# Altium PCB PCB3.PcbDoc
Units mm, origin at the board's own origin, x right, y up, seen from the top; angles counter-clockwise.
Board outline 43.69 x 43.69 mm, 2 copper layers (Top Layer, Bottom Layer); 46 components, 41 nets, 119 pads, 43 vias.
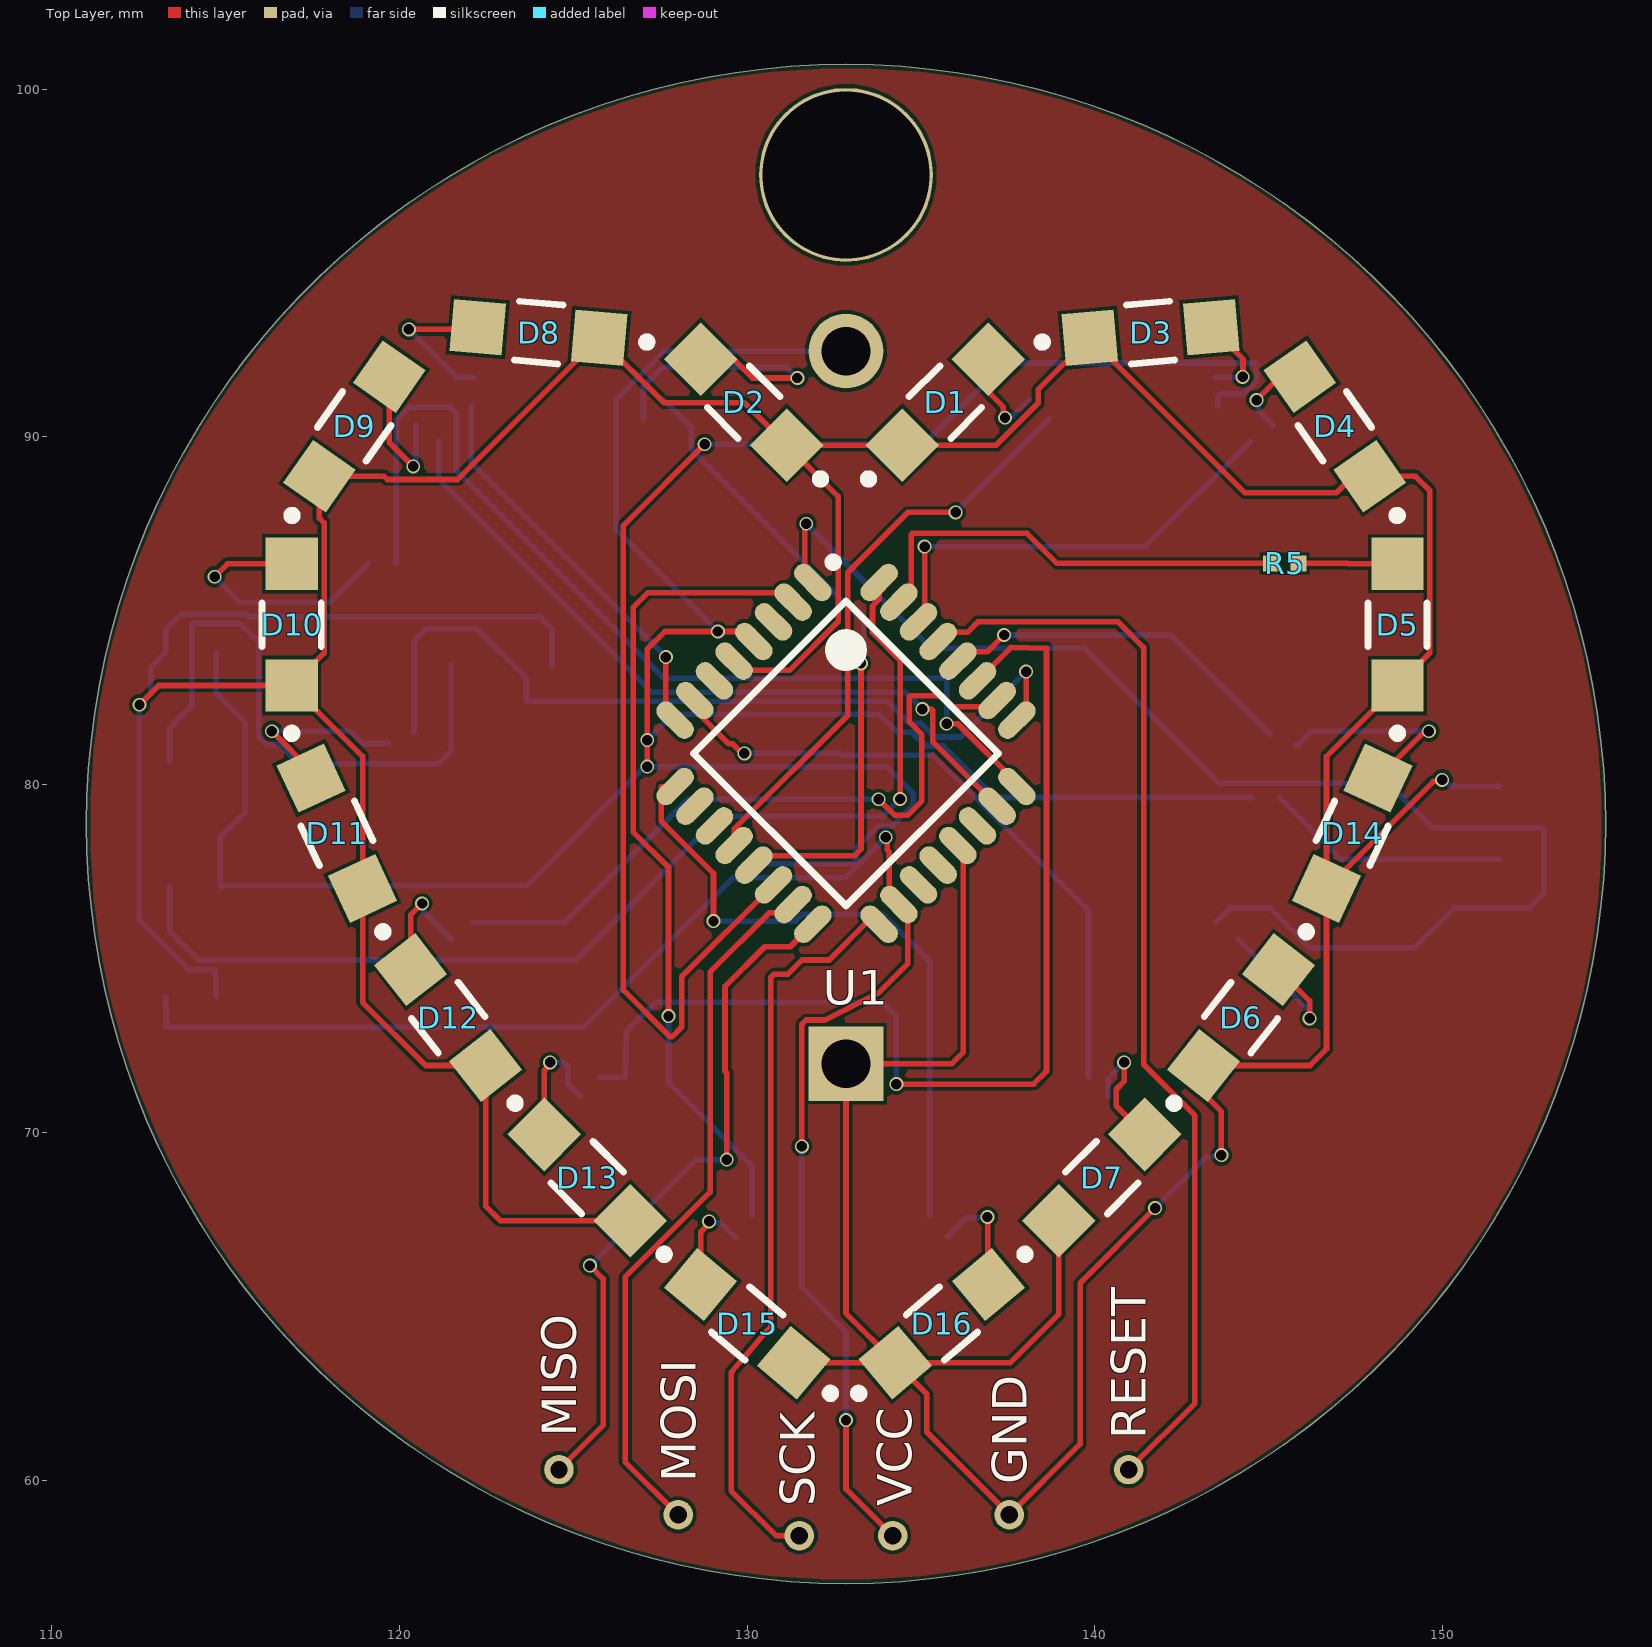
[diagram p0: Top Layer view]
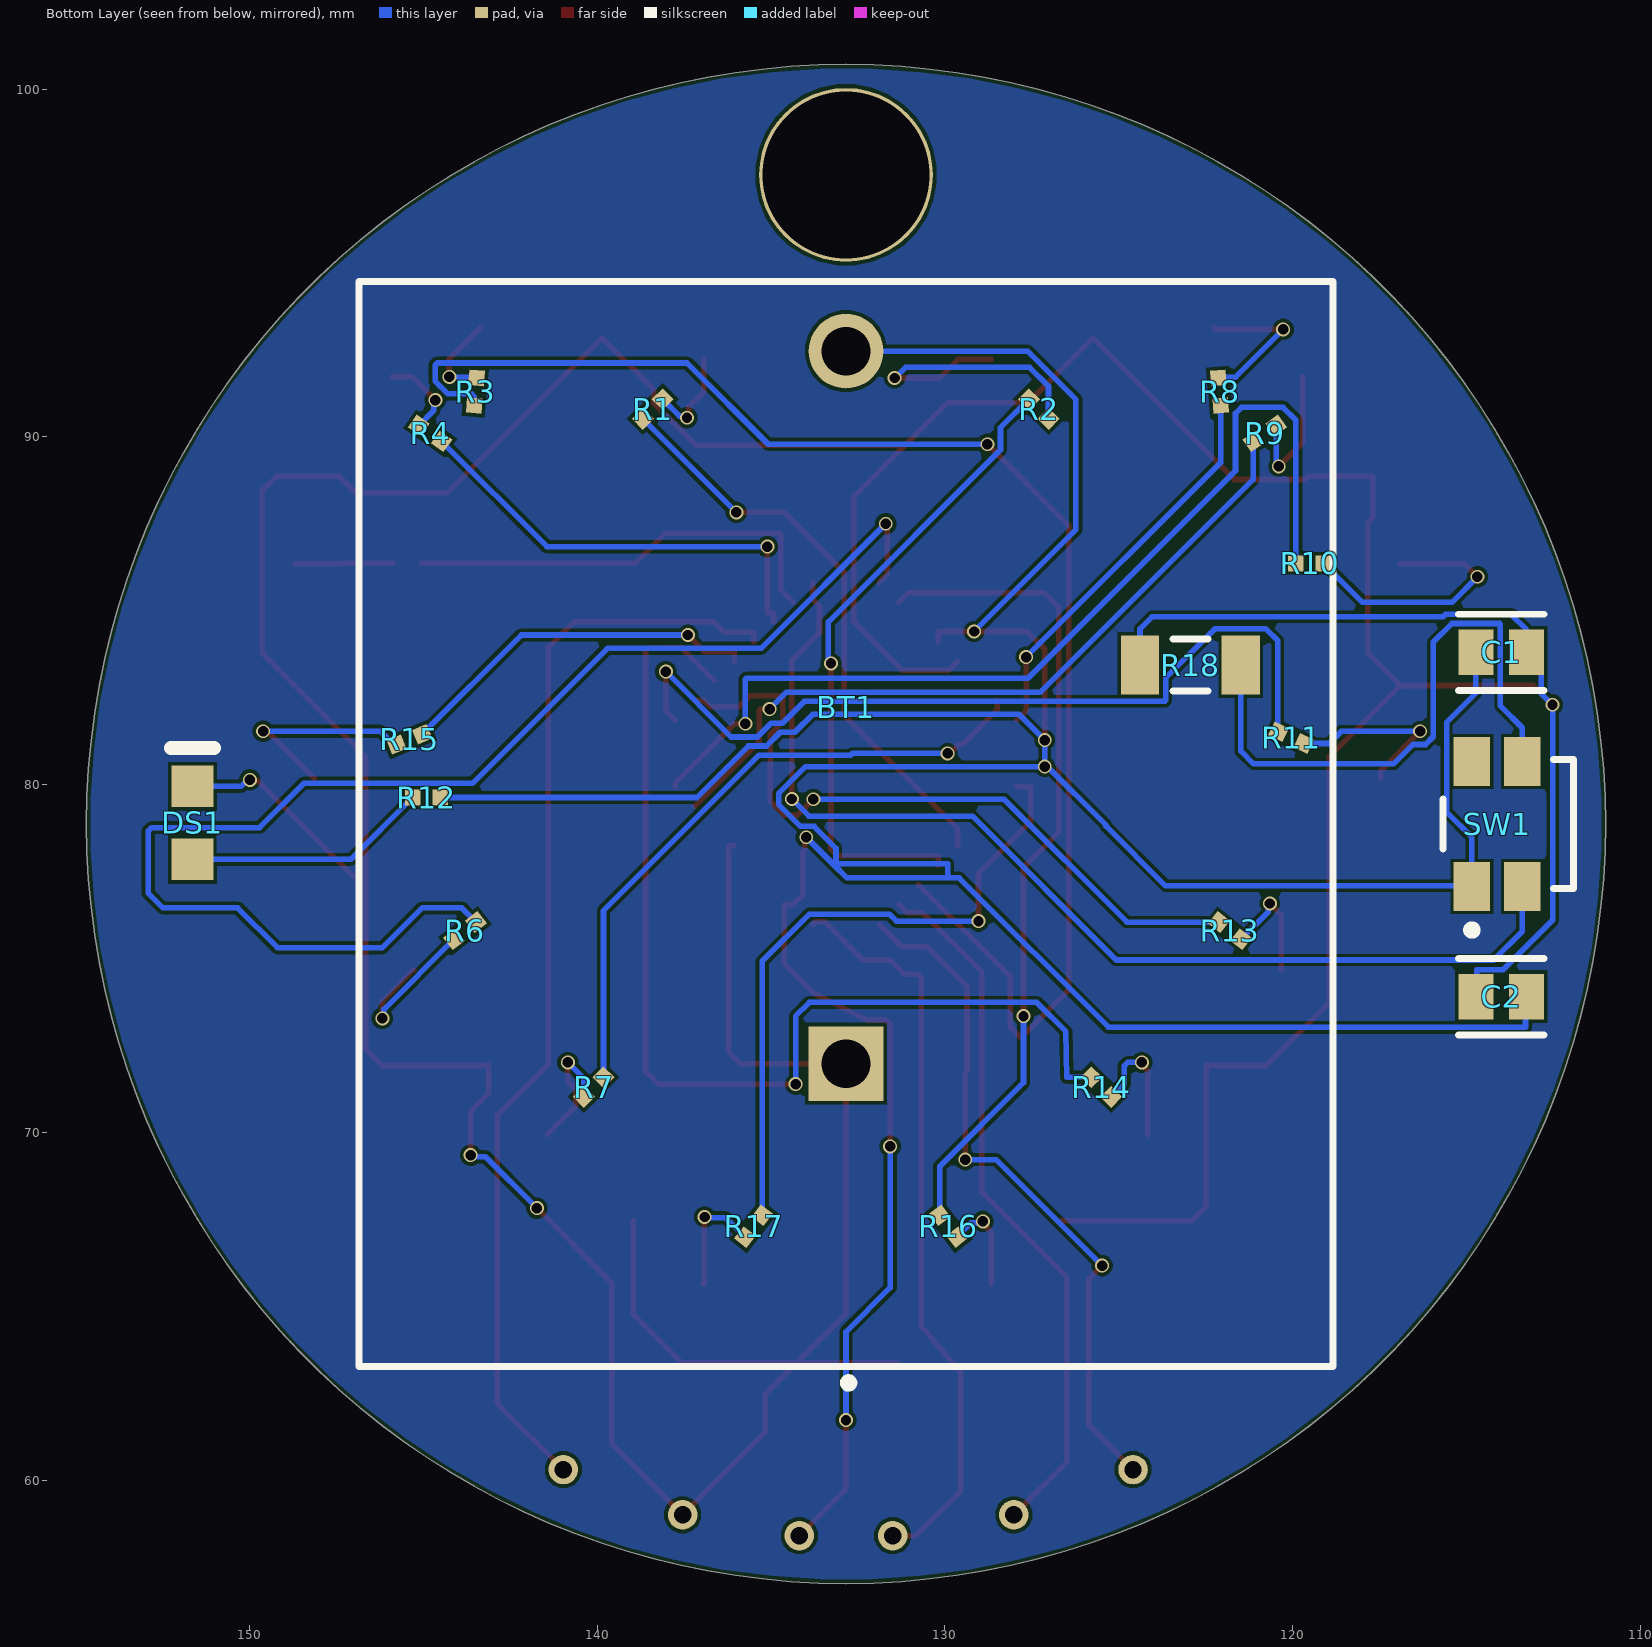
[diagram p1: Bottom Layer view, seen from below]
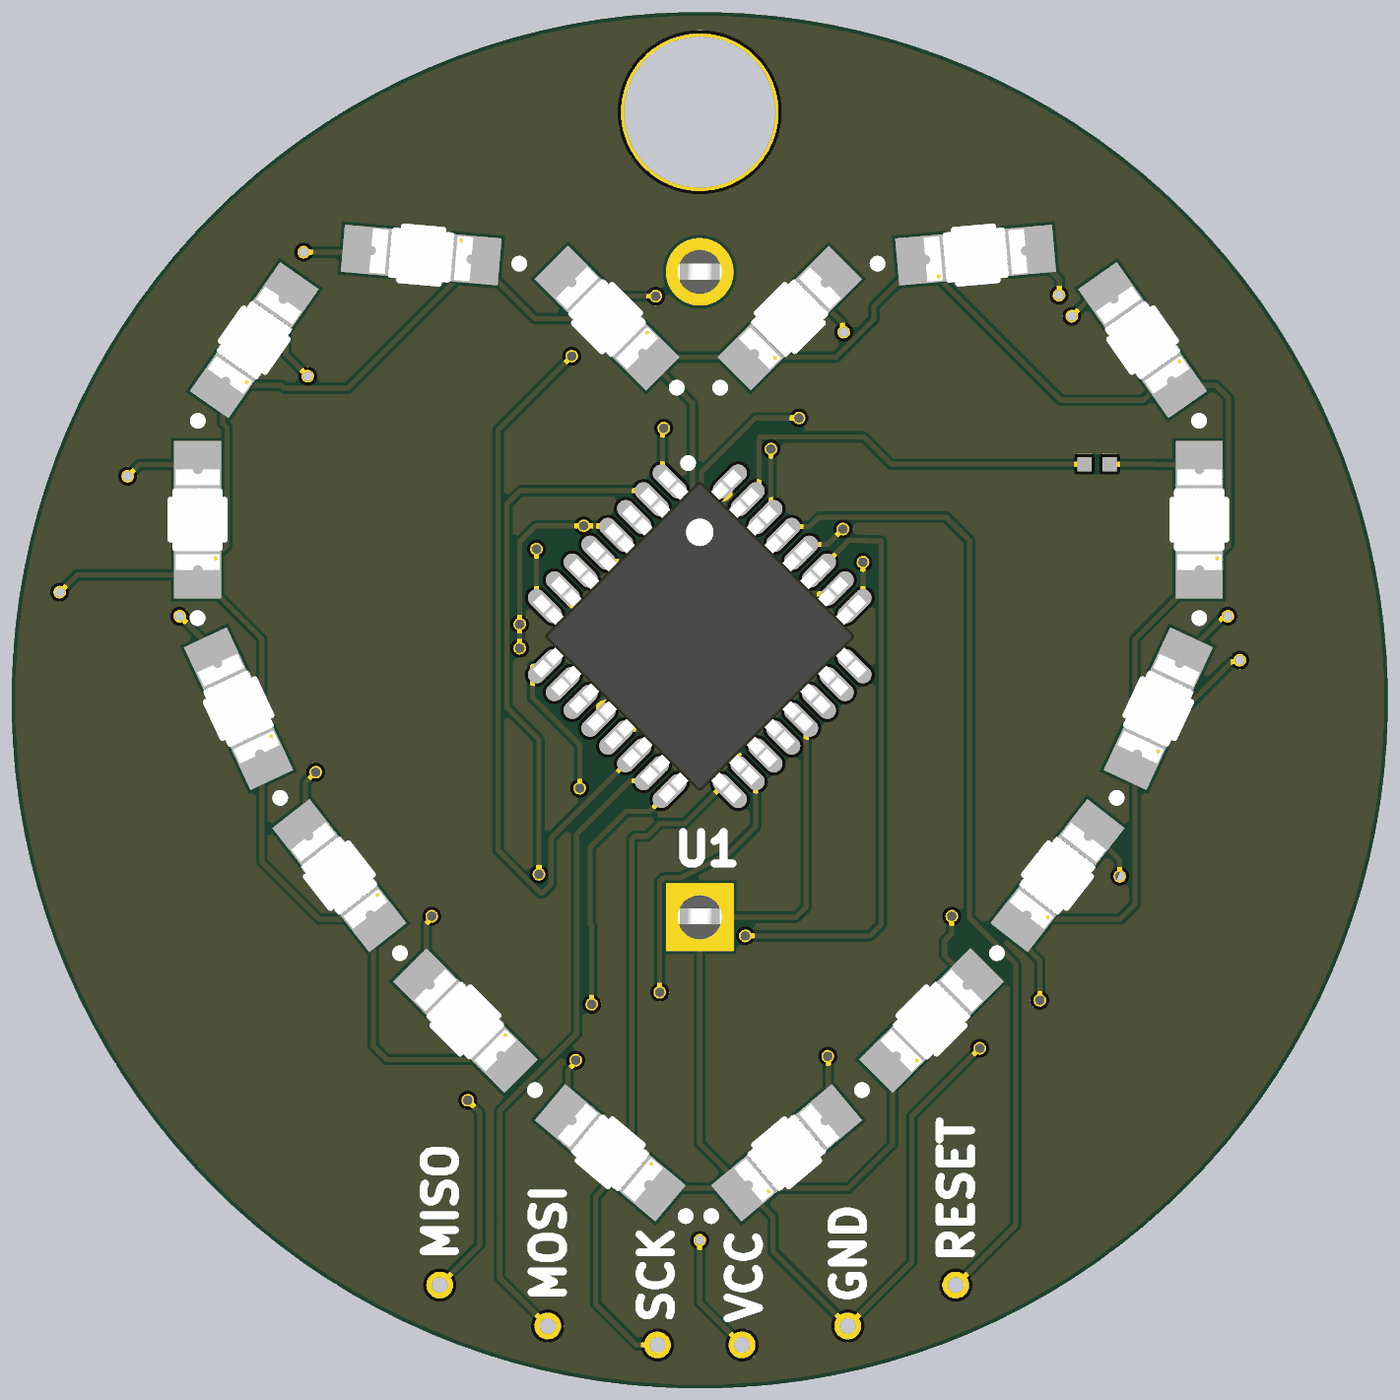
[diagram p2: 3D render of the assembled board from above, using the file's embedded part models]

## Layer stack, top to bottom
Top Solder: solder mask 0.0102, Solder Resist, Dk 3.5
Top Layer: signal copper 0.0356
Dielectric 1: dielectric 0.32, FR-4, Dk 4.8
Bottom Layer: signal copper 0.0356
Bottom Solder: solder mask 0.0102, Solder Resist, Dk 3.5

## Board outline
110.997,78.867 ccw(c132.842,78.867) 132.842,57.022 ccw(c132.842,78.867) 154.687,78.867 ccw(c132.842,78.867) 132.842,100.712 ccw(c132.842,78.867)

## Design rules (kind name [scope] priority, off if disabled: settings)
Clearance [All] p1: gap=0.1 ignorepadtopadclearanceinfootprint=FALSE
PolygonConnect [All] p1: connectstyle=Relief reliefconductorwidth=0.254 reliefentries=4 polygonreliefangle="90 Angle" airgapwidth=0.254
RoutingVias [All] p1: holewidth=0.3 width=0.4 viastyle="Through Hole" minholewidth=0.3 minwidth=0.4 maxholewidth=0.711 maxwidth=1.27
SolderMaskExpansion [All] p1: expansion=0.102 istentingtop=FALSE
SupplyNets "Schematic Supply Nets_1" [InNet('GND')] p1: voltage=0.000
SupplyNets "Schematic Supply Nets" [InNet('VCC')] p2: voltage=0.000
Width [All] p1: maxlimit=0.254 minlimit=0.16 preferedwidth=0.16 minimp=50.000000 maximp=50.000000 favimp=50.000000
30 further rules are at their usual default settings.

## Components (designator, comment, footprint, x,y, rotation, side; value= is the part's Value field where it differs from the comment)
BT1 "105" FP-105-MFG 132.842,78.867 r90 bottom locked
C1 "GCM21BR70J106KE22L" FP-GCM21B-0_15-IPC_C 114,83.8 r180 bottom
C2 "GCM21BR70J106KE22L" FP-GCM21B-0_15-IPC_C 114,73.9 r0 bottom
D1 "HSMS-C150" FP-HSMS-C150-MFG 135.7,91 r45 top
D2 "HSMS-C150" FP-HSMS-C150-MFG 129.9,91 r135 top
D3 "HSMS-C150" FP-HSMS-C150-MFG 141.6,93 r5 top
D4 "HSMS-C150" FP-HSMS-C150-MFG 146.9,90.3 r125 top
D5 "HSMS-C150" FP-HSMS-C150-MFG 148.7,84.6 r90 top
D6 "HSMS-C150" FP-HSMS-C150-MFG 144.2,73.3 r52 top
D7 "HSMS-C150" FP-HSMS-C150-MFG 140.2,68.7 r45 top
D8 "HSMS-C150" FP-HSMS-C150-MFG 124,93 r175 top
D9 "HSMS-C150" FP-HSMS-C150-MFG 118.7,90.3 r55 top
D10 "HSMS-C150" FP-HSMS-C150-MFG 116.9,84.6 r90 top
D11 "HSMS-C150" FP-HSMS-C150-MFG 118.2,78.6 r115 top
D12 "HSMS-C150" FP-HSMS-C150-MFG 121.4,73.3 r128 top
D13 "HSMS-C150" FP-HSMS-C150-MFG 125.4,68.7 r135 top
D14 "HSMS-C150" FP-HSMS-C150-MFG 147.4,78.6 r65 top
D15 "HSMS-C150" FP-HSMS-C150-MFG 130,64.5 r140 top
D16 "HSMS-C150" FP-HSMS-C150-MFG 135.6,64.5 r40 top
DS1 "HSMG-C170" AVAG-HSMX-C170_V 151.638,78.9 r90 bottom
GND "GND" PCBComponent_1#1 137.541,59.283 r90 top (schematic designator gnd1)
MISO "MISO" PCBComponent_1#2 124.587,60.325 r90 top (schematic designator miso1)
MOSI "MOSI" PCBComponent_1#3 128.016,59.256 r90 top (schematic designator mosi1)
R1 "CRCW040260R4FKED" RESC1005X40X25LL05T05 138.4,90.8 r135 bottom
R2 "CRCW040260R4FKED" RESC1005X40X25LL05T05 127.3,90.8 r225 bottom
R3 "CRCW040260R4FKED" RESC1005X40X25LL05T05 143.5,91.3 r95 bottom
R4 "CRCW040260R4FKED" RESC1005X40X25LL05T05 144.8,90.1 r35 bottom
R5 "CRCW040260R4FKED" RESC1005X40X25LL05T05 145.458,86.36 r0 top
R6 "CRCW040260R4FKED" RESC1005X40X25LL05T05 143.8,75.8 r322 bottom
R7 "CRCW040260R4FKED" RESC1005X40X25LL05T05 140.1,71.3 r315 bottom
R8 "CRCW040260R4FKED" RESC1005X40X25LL05T05 122.1,91.3 r85 bottom
R9 "CRCW040260R4FKED" RESC1005X40X25LL05T05 120.8,90.1 r145 bottom
R10 "CRCW040260R4FKED" RESC1005X40X25LL05T05 119.507,86.36 r180 bottom
R11 "CRCW040260R4FKED" RESC1005X40X25LL05T05 120.042,81.352 r205 bottom
R12 "CRCW040260R4FKED" RESC1005X40X25LL05T05 144.907,79.629 r0 bottom
R13 "CRCW040260R4FKED" RESC1005X40X25LL05T05 121.8,75.8 r218 bottom
R14 "CRCW040260R4FKED" RESC1005X40X25LL05T05 125.5,71.3 r225 bottom
R15 "CRCW040260R4FKED" RESC1005X40X25LL05T05 145.4,81.3 r338 bottom
R16 "CRCW040260R4FKED" RESC1005X40X25LL05T05 129.9,67.3 r232 bottom
R17 "CRCW040260R4FKED" RESC1005X40X25LL05T05 135.5,67.3 r308 bottom
R18 "CRCW1206100KFKEA" RESC3216X60X45NL10T20 122.936,83.439 r180 bottom
RESET "RESET" PCBComponent_1#4 141.771,60.312 r90 top (schematic designator reset1)
SCK "SCK" PCBComponent_1#5 130.683,58.6 r90 top (schematic designator sck1)
SW1 "EVQ-P7B01P" FP-EVQ-P7B01P-MFG 113.792,78.867 r90 bottom
U1 "ATMEGA328PB-AU" ATML-32A_L 132.842,80.899 r315 top
VCC "VCC" PCBComponent_1#6 134.24,58.34 r90 top (schematic designator vcc1)

## Footprints (in the part's own frame and the unit in brackets; to place one, negate y for a bottom-side part, rotate by r counter-clockwise, add the part's x,y. Pads: shape width x height; smd on the part's side, far side on the other; paste and mask are expansions set on the pad)
ATML-32A_L [mm] "TQFP, 32-Leads, Body 7x7mm, Pitch 0.8mm, IPC High Density"
  oval 1.3x0.55 smd: 1(-4.15,2.8) 2(-4.15,2) 3(-4.15,1.2) 4(-4.15,0.4) 5(-4.15,-0.4) 6(-4.15,-1.2) 7(-4.15,-2) 8(-4.15,-2.8) 17(4.15,-2.8) 18(4.15,-2) 19(4.15,-1.2) 20(4.15,-0.4) 21(4.15,0.4) 22(4.15,1.2) 23(4.15,2) 24(4.15,2.8)
  oval 0.55x1.3 smd: 9(-2.8,-4.15) 10(-2,-4.15) 11(-1.2,-4.15) 12(-0.4,-4.15) 13(0.4,-4.15) 14(1.2,-4.15) 15(2,-4.15) 16(2.8,-4.15) 25(2.8,4.15) 26(2,4.15) 27(1.2,4.15) 28(0.4,4.15) 29(-0.4,4.15) 30(-1.2,4.15) 31(-2,4.15) 32(-2.8,4.15)
  silkscreen extent -4.27,-3.1 3.1,3.75, body extent -4.5,-4.5 4.5,4.5, height 1.2
AVAG-HSMX-C170_V [mm] "SMD, 2-Leads, Body 2x1.25mm, Height 0.8mm"
  rect 1.2x1.2 smd: 1(-1.05,0) 2(1.05,0)
  silkscreen extent 2.15,-0.62 2.15,0.62, body extent -1,-0.63 1,0.63, height 0.8
FP-105-MFG [mm]
  rect 2.145x2.145 hole 1.395 paste-2539.97 mask+0: 1(-6.89,0)
  round 2.145 hole 1.395 paste-2539.97 mask+0: 2(13.6,0)
  silkscreen extent -16.2,-14.01 15.6,14.01, body extent -15.48,-13.88 15.48,13.88, height 8.76
FP-EVQ-P7B01P-MFG [mm]
  rect 1.4x1.05 smd paste+0 mask+0: 1(-1.8,1.05) 1'(1.8,1.05) 2(-1.8,-0.4) 2'(1.8,-0.4)
  silkscreen extent -3.17,-1.87 1.85,1.87, body extent -2.15,-1.78 2.15,1.78, height 1.55
FP-GCM21B-0_15-IPC_C [mm]
  rect 1.006x1.308 smd paste+0 mask+0: 1(-0.726,0) 2(0.726,0)
  silkscreen extent -1.23,-1.1 1.23,1.1, body extent -1,-0.63 1,0.63, height 1.4
FP-HSMS-C150-MFG [mm]
  rect 1.5x1.5 smd paste+0 mask+0: 1(-1.75,0) 2(1.75,0)
  silkscreen extent -3.25,-0.85 0.63,0.85, body extent -2.6,-0.95 2.6,0.95, height 0.25
PCBComponent_1#1 [mm]
  round 0.85 hole 0.5: "MISO "(-0.283,0)
PCBComponent_1#2 [mm]
  round 0.85 hole 0.5: "MISO "(-0.025,0)
PCBComponent_1#3 [mm]
  round 0.85 hole 0.5: "MISO "(-0.256,0)
PCBComponent_1#4 [mm]
  round 0.85 hole 0.5: "MISO "(-0.012,0.801)
PCBComponent_1#5 [mm]
  round 0.85 hole 0.5: "MISO "(-0.2,-0.817)
PCBComponent_1#6 [mm]
  round 0.85 hole 0.5: "MISO "(0.06,0.056)
RESC1005X40X25LL05T05 [mm] "Chip Resistor, 2-Leads, Body 1.00x0.50mm, IPC High Density"
  rect 0.45x0.45 smd: 1(-0.4,0) 2(0.4,0)
  body extent -0.53,-0.27 0.53,0.28, height 0.4
RESC3216X60X45NL10T20 [mm] "Chip Resistor, 2-Leads, Body 3.20x1.60mm, IPC Medium Density"
  rect 1.1x1.7 smd: 1(-1.45,0) 2(1.45,0)
  silkscreen extent -0.5,-0.75 0.5,0.75, body extent -1.65,-0.85 1.65,0.85, height 0.6

## Part data
BT1: library part CMP-00214-00028800-1, "105 Battery Holder Coin Cell 1 Cell PC Pin PCB Through Hole Mount PBT 0.944 in. Dia", Max Operating Temperature=145°C, Min Operating Temperature=-50°C, Approvals=UL, Body Material="Glass, Nylon, PBT", Contact Material=Nickel, Contact Plating=Nickel, Diameter=24mm, Height=8.75mm, Lead Free="Lead Free", Material="Plastic, Steel", Mount="PCB, Through Hole", NexarPartId=28800, Number of Batteries=1, Number of Cells=1, Number of Contacts=2, Packaging=Bulk, REACH SVHC="No SVHC", RoHS=Compliant, Termination="PC Pin", Wire/Cable Gauge=1AWG
C1 C2: library part CMP-2007-03335-2, "Ceramic Capacitor for Automotive 10uF ±10% 6.3VDC X7R 0805 Embossed T/R", Capacitance=10uF, Case Code (Imperial)=0805, Case Code (Metric)=2012, Dielectric=X7R, Max Operating Temperature=125°C, Min Operating Temperature=-55°C, Package Quantity=1, Ratings=AEC-Q200, Tolerance=10%, Voltage=6.3V, Case/Package=0805, Depth=1.25mm, Height=1.25mm, Lead Free="Lead Free", Length=2mm, Mount="Surface Mount", Packaging="Tape and Reel", Radiation Hardening=No, REACH SVHC="No SVHC", Termination=SMD/SMT, Thickness=0.055inch, Voltage Rating=6.3V, Voltage Rating (DC)=6.3V, Width=0.049inch
D1 D2 D3 D4 D5 D6 D7 D8 D9 D10 D11 D12 D13 D14 D15 D16: library part CMP-21615-000001-1, "LED RED DIFFUSED CHIP SMD", Case Code (Imperial)=1206, Case Code (Metric)=3216, Color=Red, Forward Current=20mA, Forward Voltage=2.1V, Lens Color=White, Max Operating Temperature=85°C, Min Operating Temperature=-40°C, Package Quantity=1, Power Dissipation=65mW, Reverse Voltage=5V, Case/Package=1206, Depth=1.6mm, Dominant Wavelength=626nm, Height=1.1mm, Illumination Color=Red, Lead Free="Lead Free", Length=3.2mm, Lens Style=Rectangular, Lens Transparency=Diffused, Luminous Intensity=10mcd, Mount="Surface Mount", Number of Elements=1, Number of LEDs=1, Number of Pins=2, Packaging="Tape and Reel", Power Rating=65mW, Radiation Hardening=No, REACH SVHC="No SVHC", Test Current=20mA, Viewing Angle=170°, Wavelength=626nm, Width=1.6mm
DS1: library part CMP-2000-05062-1, "Chip LED, Green, 2.2 V, -40 to 85 degC, 2-Pin SMD, Pb-Free, Tape and Reel", Forward Current If=20mA, Forward Voltage=2.2V, Forward Voltage VF Max=2.6V, LED Colour=Green, Manufacturer=Avago, Operating Temperature Max=85degC, Operating Temperature Min=-30degC, Operating Temperature Range=-30degCto+85degC, Opto Case Style=SMD, Package Description="2-Pin Surface Mount Device, Body 2 x 1.25 mm, Height 0.8 mm", Package Reference=HSMX-C170, Storage Temperature Min=-40degC, Bulb Size=1.25mmx1.4mm, Datasheet URL=https://datasheet.ciiva.com/29280/180495-da-01-en-chip-led-hsmg-c170-gelb-gruen-29280971.pdf, Datasheet Version=Oct-08, Dominant Wavelength=572nm, Dominant Wavelength Typ=572nm, External Depth=0.8mm, External Length / Height=2mm, External Width=1.25mm, Forward Current If Max=20mA, LED Mounting=SMD, LED Type=Standard, Lens Shape=Rectangular, Light Area Height=1mm, Luminous Intensity=15mcd, Luminous Intensity Min=4mcd, Luminous Intensity Typ=15mcd, Manufacturer URL=http://www.avagotech.com/, Mounting Type=SMD, MSL=MSL2A-4weeks, No. of Pins=2, Opto Mounting Orientation=Top, Packaging=CutTape, Peak Forward Current=20mA, Peak Wavelength=570nm, PIV Max=5V, Storage Temperature Max=85degC, SVHC=NoSVHC(16-Jun-2014), Viewing Angle=170deg, Voltage Vf Typ=2.2V, Wavelength Typ=570nm
GND MISO MOSI RESET SCK VCC: library part Component_1, "pad for pins"
R1 R2 R3 R4 R5 R6 R7 R8 R9 R10 R11 R12 R13 R14 R15 R16 R17: library part CMP-2002-00141-1, Manufacturer="Vishay Dale", Part Number=CRCW040260R4FKED
R18: library part CMP-1014-00736-2, Manufacturer="Vishay Dale", Part Number=CRCW1206100KFKEA
SW1: library part CMP-05618-000129-1, "SWITCH TACTILE SPST-NO 0.05A 12V", Case/Package=SMD/SMT, Max Operating Temperature=70°C, Max Voltage Rating (DC)=12V, Min Operating Temperature=-20°C, Operating Force=2.2N, Package Quantity=5000, Illumination Type=Non-Illuminated, Lead Free="Lead Free", Mechanical Life=100000Cycles, Mount="Surface Mount", Packaging="Tape and Reel", Radiation Hardening=No, Switch Function=Off-Mom, Switch Travel=0.2mm, Termination=J-Bend, Throw Configuration=SPST
U1: library part CMP-2000-07439-1, "AVR Microcontroller, 1.8 to 5.5 V, 32 KB Flash, 1 KB EEPROM, 2 KB SRAM, -40 to 85 degC, 32-Pin TQFP (32A), RoHS, Tray", Manufacturer=Microchip, Package Description="32-Pin Thin Profile Plastic Quad Flat Package, Body 7 x 7 mm, Pitch 0.8 mm", Package Reference=32A, Datasheet URL=http://ww1.microchip.com/downloads/en/DeviceDoc/40001906A.pdf, Datasheet Version="Rev. A, 04/2017", Manufacturer URL=http://www.microchip.com/, Mounting Technology=SurfaceMount, RoHSCompliant=false

## Free pads (board coordinates)
  round 5 hole 4.8: 2(132.842,97.536)

## Via types
v1: diameter 0.4, hole 0.3, Top Layer to Bottom Layer, 43 vias

## Nets (pads, with @x,y where several pads share a name; then routed paths per layer and width w, separated by ;. In a path a pad name is that pad's centre, name@x,y a point inside that pad or via, vN(x,y) a via of type N, cw(c..) or ccw(c..) an arc to the next point about the centre after c; other vN are vias at no path point)
GND: "GND.MISO " BT1.1 C1.2 C2.2 D1.1 D2.1 D3.1 D4.1 D5.1 D6.1 D7.1 D8.1 D9.1 D10.1 D11.1 D12.1 D13.1 D14.1 D15.1 D16.1 DS1.2 R18.1 U1.5 U1.21 | length 185.1
  Top Layer w0.16: v1(112.522,82.296) 113.076,82.85 D10.1 ; D13.1 122.898,67.463 122.477,67.883 D12.1 120.755,71.921 118.94,73.736 D11.1 118.94,80.81 D10.1 ; U1.5 129.89,83.285 131.215,83.285 132.613,84.684 132.613,88.287 D2.1 ; D15.1 D16.1 ; U1.21 136.22,78.247 136.22,72.307 135.89,71.977 BT1.1 132.842,64.793 D16.1 ; D7.1 138.963,64.77 137.568,63.375 D16.1 ; v1(141.732,67.818) 139.573,65.659 139.573,61.032 137.541,59 135.168,61.373 135.168,62.466 D16.1 ; v1(143.637,69.342) 143.637,70.596 143.123,71.111 D6.1 146.191,71.921 146.66,72.39 D14.1 ; v1(149.987,80.137) 149.941,80.091 149.738,80.091 D14.1 ; D10.1 117.831,83.781 117.831,87.528 117.696,87.663 D9.1 119.561,88.866 119.653,88.774 121.67,88.774 D8.1 127.608,90.983 129.917,90.983 D2.1 ; D2.1 D1.1 137.163,89.763 138.369,90.968 138.369,91.36 D3.1 144.312,88.392 146.943,88.392 147.417,88.866 149.225,88.866 149.631,88.46 149.631,83.781 D5.1 146.66,80.81 D14.1
  Bottom Layer w0.16: C2.2 114.701,74.676 113.944,74.676 112.522,76.098 v1(112.522,82.296) 112.851,82.625 112.851,83.377 C1.2 113.274,84.455 113.713,84.894 115.601,84.894 115.669,84.826 124.041,84.826 124.386,84.48 R18.1 ; v1(141.732,67.818) 143.21,69.296 143.591,69.296 v1(143.637,69.342) ; v1(149.987,80.137) 150.052,80.137 150.239,79.95 DS1.2
NetD1_2: D1.2 R1.2 | length 2.8
  Top Layer w0.16: D1.2 136.937,91.29 137.368,90.859 137.368,90.597 v1(137.414,90.551)
  Bottom Layer w0.16: v1(137.414,90.551) 137.46,90.597 137.631,90.597 R1.2
NetD2_2: D2.2 R2.2 | length 8.7
  Top Layer w0.16: D2.2 129.61,92.237 130.154,91.694 v1(131.445,91.694)
  Bottom Layer w0.16: R2.2 127.017,91.457 127.559,91.999 131.128,91.999 131.432,91.694 v1(131.445,91.694)
NetD3_2: D3.2 R3.2 | length 2.6
  Top Layer w0.16: D3.2 144.26,92.236 144.26,91.739 v1(144.248,91.727)
  Bottom Layer w0.16: R3.2 143.479,91.713 144.233,91.713 v1(144.248,91.727)
NetD4_2: D4.2 R4.2 | length 2.4
  Top Layer w0.16: v1(144.653,91.059) 145.328,91.734 D4.2
  Bottom Layer w0.16: v1(144.653,91.059) 144.699,91.013 144.699,90.758 R4.2
NetD5_2: D5.2 R5.2 | length 2.8
  Top Layer w0.16: R5.2 147.269,86.36 147.279,86.35 D5.2
NetD6_2: D6.2 R6.2 | length 4.9
  Top Layer w0.16: D6.2 146.177,73.779 v1(146.177,73.279)
  Bottom Layer w0.16: R6.2 146.131,73.538 146.131,73.325 v1(146.177,73.279)
NetD7_2: D7.2 R7.2 | length 3.7
  Top Layer w0.16: v1(140.843,72.009) 140.843,71.467 140.614,71.238 140.614,70.76 D7.2
  Bottom Layer w0.16: R7.2 140.383,71.549 v1(140.843,72.009)
NetD8_2: D8.2 R8.2 | length 4.5
  Top Layer w0.16: v1(120.269,93.091) 122.195,93.091 D8.2
  Bottom Layer w0.16: v1(120.269,93.091) 121.641,91.719 122.114,91.719 R8.2
NetD9_2: D9.2 R9.2 | length 4.1
  Top Layer w0.16: D9.2 119.704,89.846 v1(120.396,89.154)
  Bottom Layer w0.16: v1(120.396,89.154) 120.396,89.219 120.472,89.295 R9.2
NetD10_2: D10.2 R10.2 | length 7.6
  Top Layer w0.16: v1(114.681,85.979) 115.052,86.35 D10.2
  Bottom Layer w0.16: v1(114.681,85.979) 115.418,85.242 117.989,85.242 R10.2
NetD11_2: D11.2 R11.2 | length 5.3
  Top Layer w0.16: v1(116.332,81.534) 117.46,80.406 D11.2
  Bottom Layer w0.16: v1(116.332,81.534) 118.597,81.534 118.948,81.183 R11.2
NetD12_2: D12.2 R13.2 | length 3.4
  Top Layer w0.16: D12.2 120.323,76.254 v1(120.65,76.581)
  Bottom Layer w0.16: v1(120.65,76.581) 120.696,76.535 120.696,76.343 R13.2
NetD13_2: D13.2 R14.2 | length 3.7
  Top Layer w0.16: D13.2 124.163,71.774 124.333,71.944 v1(124.333,72.009)
  Bottom Layer w0.16: v1(124.333,72.009) 124.743,72.009 124.837,71.915 124.837,71.398 R14.2
NetD14_2: D14.2 R15.2 | length 6
  Top Layer w0.16: D14.2 149.442,81.488 149.56,81.488 v1(149.606,81.534)
  Bottom Layer w0.16: R15.2 145.852,81.15 146.235,81.534 v1(149.606,81.534)
NetD15_2: D15.2 R16.2 | length 2.8
  Top Layer w0.16: D15.2 128.659,67.126 128.905,67.372 v1(128.905,67.437)
  Bottom Layer w0.16: v1(128.905,67.437) 128.951,67.391 129.247,67.391 R16.2
NetD16_2: D16.2 R17.2 | length 3.3
  Top Layer w0.16: v1(136.906,67.564) 136.923,67.547 136.923,65.642 D16.2
  Bottom Layer w0.16: R17.2@135.752,66.99 136.301,67.54 136.882,67.54 v1(136.906,67.564)
NetDS1_1: DS1.1 R12.2 | length 7.1
  Bottom Layer w0.16: R12.2 147.086,77.85 DS1.1
Netmiso1_1: "MISO.MISO " U1.16 | length 20
  Top Layer w0.16: 124.587,60.3 125.857,61.57 125.857,65.786 v1(125.476,66.167) ; v1(129.413,69.215) 129.413,71.711 129.362,71.762 129.362,74.193 130.505,75.336 131.239,75.336 U1.16
  Bottom Layer w0.16: v1(125.476,66.167) 128.524,69.215 v1(129.413,69.215)
Netmosi1_1: "MOSI.MISO " U1.15 | length 20.4
  Top Layer w0.16: 128.016,59 126.492,60.524 126.492,65.838 128.934,68.28 128.934,74.611 130.635,76.312 131.084,76.312 U1.15
NetR1_1: R1.1 U1.12 | length 16.8
  Top Layer w0.16: U1.12 129.625,78.722 132.893,81.99 132.893,86.102 134.618,87.828 v1(135.993,87.828)
  Bottom Layer w0.16: v1(135.993,87.828) R1.1
NetR2_1: R2.1 U1.13 | length 18.8
  Top Layer w0.16: U1.13 130.19,77.953 133.083,77.953 133.274,78.143 v1(133.274,83.486)
  Bottom Layer w0.16: R2.1 128.398,90.268 128.398,89.632 133.35,84.68 133.35,83.563 v1(133.274,83.486)
NetR3_1: R3.1 U1.14 | length 43.1
  Top Layer w0.16: v1(128.778,89.789) 126.441,87.452 126.441,74.092 127.787,72.746 127.838,72.746 128.118,73.025 128.118,74.478 U1.14
  Bottom Layer w0.16: v1(128.778,89.789) 135.077,89.789 137.414,92.126 144.602,92.126 144.653,92.075 144.653,91.595 144.497,91.439 144.496,91.439 144.293,91.237 143.611,91.237 143.535,91.161 R3.1
NetR4_1: R4.1 U1.30 | length 13
  Top Layer w0.16: U1.30 134.928,84.938 135.103,84.938 v1(135.103,86.843)
  Bottom Layer w0.16: v1(135.103,86.843) 141.444,86.843 R4.1
NetR5_1: R5.1 U1.31 | length 12.8
  Top Layer w0.16: U1.31 134.722,85.607 134.722,87.198 134.747,87.224 138.049,87.224 138.913,86.36 R5.1
NetR6_1: R6.1 U1.1 | length 39.2
  Top Layer w0.16: v1(131.699,87.503) 131.661,87.465 131.661,86.04 U1.1
  Bottom Layer w0.16: v1(131.699,87.503) 135.282,83.92 139.702,83.92 143.586,80.035 148.438,80.035 149.708,78.765 152.814,78.765 152.908,78.672 152.908,76.872 152.49,76.454 150.341,76.454 149.198,75.311 146.177,75.311 145.034,76.454 143.893,76.454 R6.1
NetR7_1: R7.1 U1.7 | length 18.8
  Top Layer w0.16: U1.7 128.493,82.144 129.462,81.175 129.579,81.175 129.856,80.898 v1(129.921,80.898)
  Bottom Layer w0.16: v1(129.921,80.898) 132.655,80.898 132.703,80.85 135.342,80.85 139.817,76.375 R7.1
NetR8_1: R8.1 U1.8 | length 11.5
  Top Layer w0.16: v1(127.66,83.668) 127.66,82.121 U1.8
  Bottom Layer w0.16: R8.1 122.065,89.263 v1(127.66,83.668)
NetR9_1: R9.1 U1.23 | length 21.6
  Top Layer w0.16: v1(135.039,82.169) 135.309,82.169 135.334,82.144 135.334,81.235 U1.23
  Bottom Layer w0.16: R9.1 121.128,89.737 121.132,89.737 121.132,88.774 127.248,82.658 134.55,82.658 v1(135.039,82.169)
NetR10_1: R10.1 U1.24 | length 28.4
  Top Layer w0.16: v1(135.738,81.75) 136.055,81.75 137.756,80.049 U1.24
  Bottom Layer w0.16: R10.1 119.907,90.487 120.269,90.849 121.469,90.849 121.641,90.678 121.641,89.027 127.61,83.058 135.712,83.058 135.738,83.033 v1(135.738,81.75)
NetR11_1: R11.1 U1.25 | length 24.3
  Top Layer w0.16: U1.25 138.024,82.121 v1(138.024,83.248)
  Bottom Layer w0.16: R11.1 120.421,81.521 120.421,84.138 120.764,84.48 122.237,84.48 123.647,83.071 123.647,82.423 123.673,82.398 134.038,82.398 134.671,81.765 135,81.765 135.395,81.37 136.145,81.37 v1(138.024,83.248)
NetR13_1: R13.1 U1.26 | length 20.6
  Top Layer w0.16: v1(133.782,79.578) 134.239,79.121 134.62,79.121 135.026,79.527 135.026,81.446 134.659,81.813 134.659,82.525 134.684,82.55 135.611,82.55 135.915,82.245 136.751,82.245 136.926,82.419 U1.26
  Bottom Layer w0.16: R13.1 124.763,76.046 128.295,79.578 v1(133.782,79.578)
NetR14_1: R14.1 U1.27 | length 31.3
  Top Layer w0.16: v1(134.29,71.387) 138.239,71.387 138.608,71.755 138.608,83.922 137.587,83.947 U1.27
  Bottom Layer w0.16: R14.1 126.492,71.583 126.517,72.898 127.356,73.736 133.896,73.736 134.29,73.343 v1(134.29,71.387)
NetR15_1: R15.1 U1.28 | length 10.6
  Top Layer w0.16: U1.28 136.059,83.82 136.906,83.82 v1(137.389,84.303)
  Bottom Layer w0.16: v1(137.389,84.303) 142.176,84.303 R15.1
NetR16_1: R16.1 U1.2 | length 23.8
  Top Layer w0.16: v1(127.737,73.343) 127.737,77.622 126.721,78.638 126.721,85.09 127.152,85.522 131.048,85.522 U1.2
  Bottom Layer w0.16: v1(127.737,73.343) 127.737,71.429 130.146,69.019 R16.1
NetR17_1: R17.1 U1.9 | length 19.1
  Top Layer w0.16: U1.9 127.533,79.944 127.533,79.679 127.533,78.943 129.032,77.445 v1(129.032,76.073)
  Bottom Layer w0.16: v1(129.032,76.073) 131.395,76.073 131.598,76.276 133.896,76.276 135.254,74.919 R17.1
NetR18_2: R18.2 SW1.2' | length 17.6
  Bottom Layer w0.16: SW1.2' 113.392,81.636 114.021,82.264 114.021,84.609 114.046,84.634 115.418,84.634 115.952,84.1 115.952,81.377 116.175,81.154 116.534,81.154 117.094,80.594 121.118,80.594 121.486,80.962 R18.2
Netreset1_1: "RESET.MISO " U1.29 | length 31.6
  Top Layer w0.16: U1.29 135.494,84.379 136.332,84.379 136.636,84.683 140.666,84.683 141.402,83.947 141.402,71.958 142.875,70.485 142.875,62.205 140.97,60.3
Netsck1_1: "SCK.MISO " U1.17 | length 21.5
  Top Layer w0.16: 131.5,58.4 130.83,58.4 129.54,59.69 129.54,63.038 129.54,63.097 129.579,63.142 129.875,63.487 129.912,63.524 130.486,64.208 130.683,64.405 130.683,74.455 130.777,74.549 131.173,74.549 131.532,74.909 131.579,74.955 132.359,74.955 133.465,76.061 133.72,76.061 U1.17
NetSW1_2: SW1.2 U1.32 | length 31.2
  Top Layer w0.16: U1.32 133.797,85.326 133.604,85.133 133.604,84.373 134.399,83.578 v1(134.399,79.586)
  Bottom Layer w0.16: SW1.2 113.392,75.78 114.217,74.955 125.07,74.955 129.21,79.096 133.908,79.096 v1(134.399,79.586)
VCC: "VCC.MISO " BT1.2 C1.1 C2.1 R12.1 SW1.1 U1.4 U1.18 | length 124.5
  Top Layer w0.16: v1(127.127,80.518) 127.127,83.896 127.635,84.404 v1(129.159,84.404) 130.19,84.404 U1.4 ; v1(131.572,69.596) 131.572,72.829 131.572,72.884 131.572,73.107 131.695,73.229 132.236,73.229 133.776,74.01 134.62,74.854 134.62,76.55 U1.18 134.087,76.826 134.087,78.065 134.031,78.121 134.031,78.44 v1(133.985,78.486) ; v1(132.842,61.722) 132.842,59.742 134.184,58.4
  Bottom Layer w0.16: C2.1 113.299,73.025 125.298,73.025 129.591,77.318 129.913,77.318 ; C1.1 114.726,82.632 115.57,81.788 115.57,79.214 114.842,78.486 SW1.1@114.842,77.089 ; SW1.1 SW1.1@114.842,77.089 ; v1(127.127,80.518) 134.005,80.518 134.779,79.744 134.779,79.429 134.148,78.798 133.76,78.798 133.129,78.168 133.129,77.818 133.223,77.724 ; v1(129.159,84.404) 126.238,87.325 126.238,91.084 127.621,92.467 BT1.2 ; v1(131.572,69.596) 131.572,65.532 132.842,64.262 v1(132.842,61.722) ; v1(133.985,78.486) 133.223,77.724 ; R12.1 137.132,79.629 135.651,81.11 135.128,81.11 134.733,81.505 134.315,81.505 133.796,82.024 127.871,82.024 v1(127.127,81.28) 127.127,80.598 125.364,78.835 125.364,78.806 123.647,77.089 SW1.1@114.842,77.089 ; 129.913,77.318 132.817,77.318 133.223,77.724 ; 129.913,77.318 129.913,77.724 133.223,77.724
pads on no net: SW1.1' U1.3 U1.6 U1.10 U1.11 U1.19 U1.20 U1.22

## Polygon pours and split planes (outlines as drawn)
no net on Top Layer "NONET_L02_P-001" (solid, pour order 0): 111.116,78.867 ccw(c132.842,78.867) 132.842,57.141 ccw(c132.842,78.867) 154.568,78.867 ccw(c132.842,78.867) 132.842,100.593 ccw(c132.842,78.867)
no net on Bottom Layer "NONET_L02_P-001" (solid, pour order 1): 111.122,78.867 ccw(c132.842,78.867) 132.842,57.147 ccw(c132.842,78.867) 154.562,78.867 ccw(c132.842,78.867) 132.842,100.587 ccw(c132.842,78.867)

## Silkscreen, mask and mechanical layers (free items; w line width, h text height)
Mechanical 1:
  circle w0.254: c132.842,78.867 r21.717